# Altium PCB DIOT_Sampler 20spacin.PCBDOC (part 5 of 8)
Units mm, origin at the board's own origin, x right, y up, seen from the top; angles counter-clockwise.
Board outline 222.37 x 100 mm, 4 copper layers (Top, GP1(GND), L3, Bot), stack 1.648 mm thick; 680 components, 424 nets, 2212 pads, 808 vias.
Unrouted connection lines stored in the file: 327.
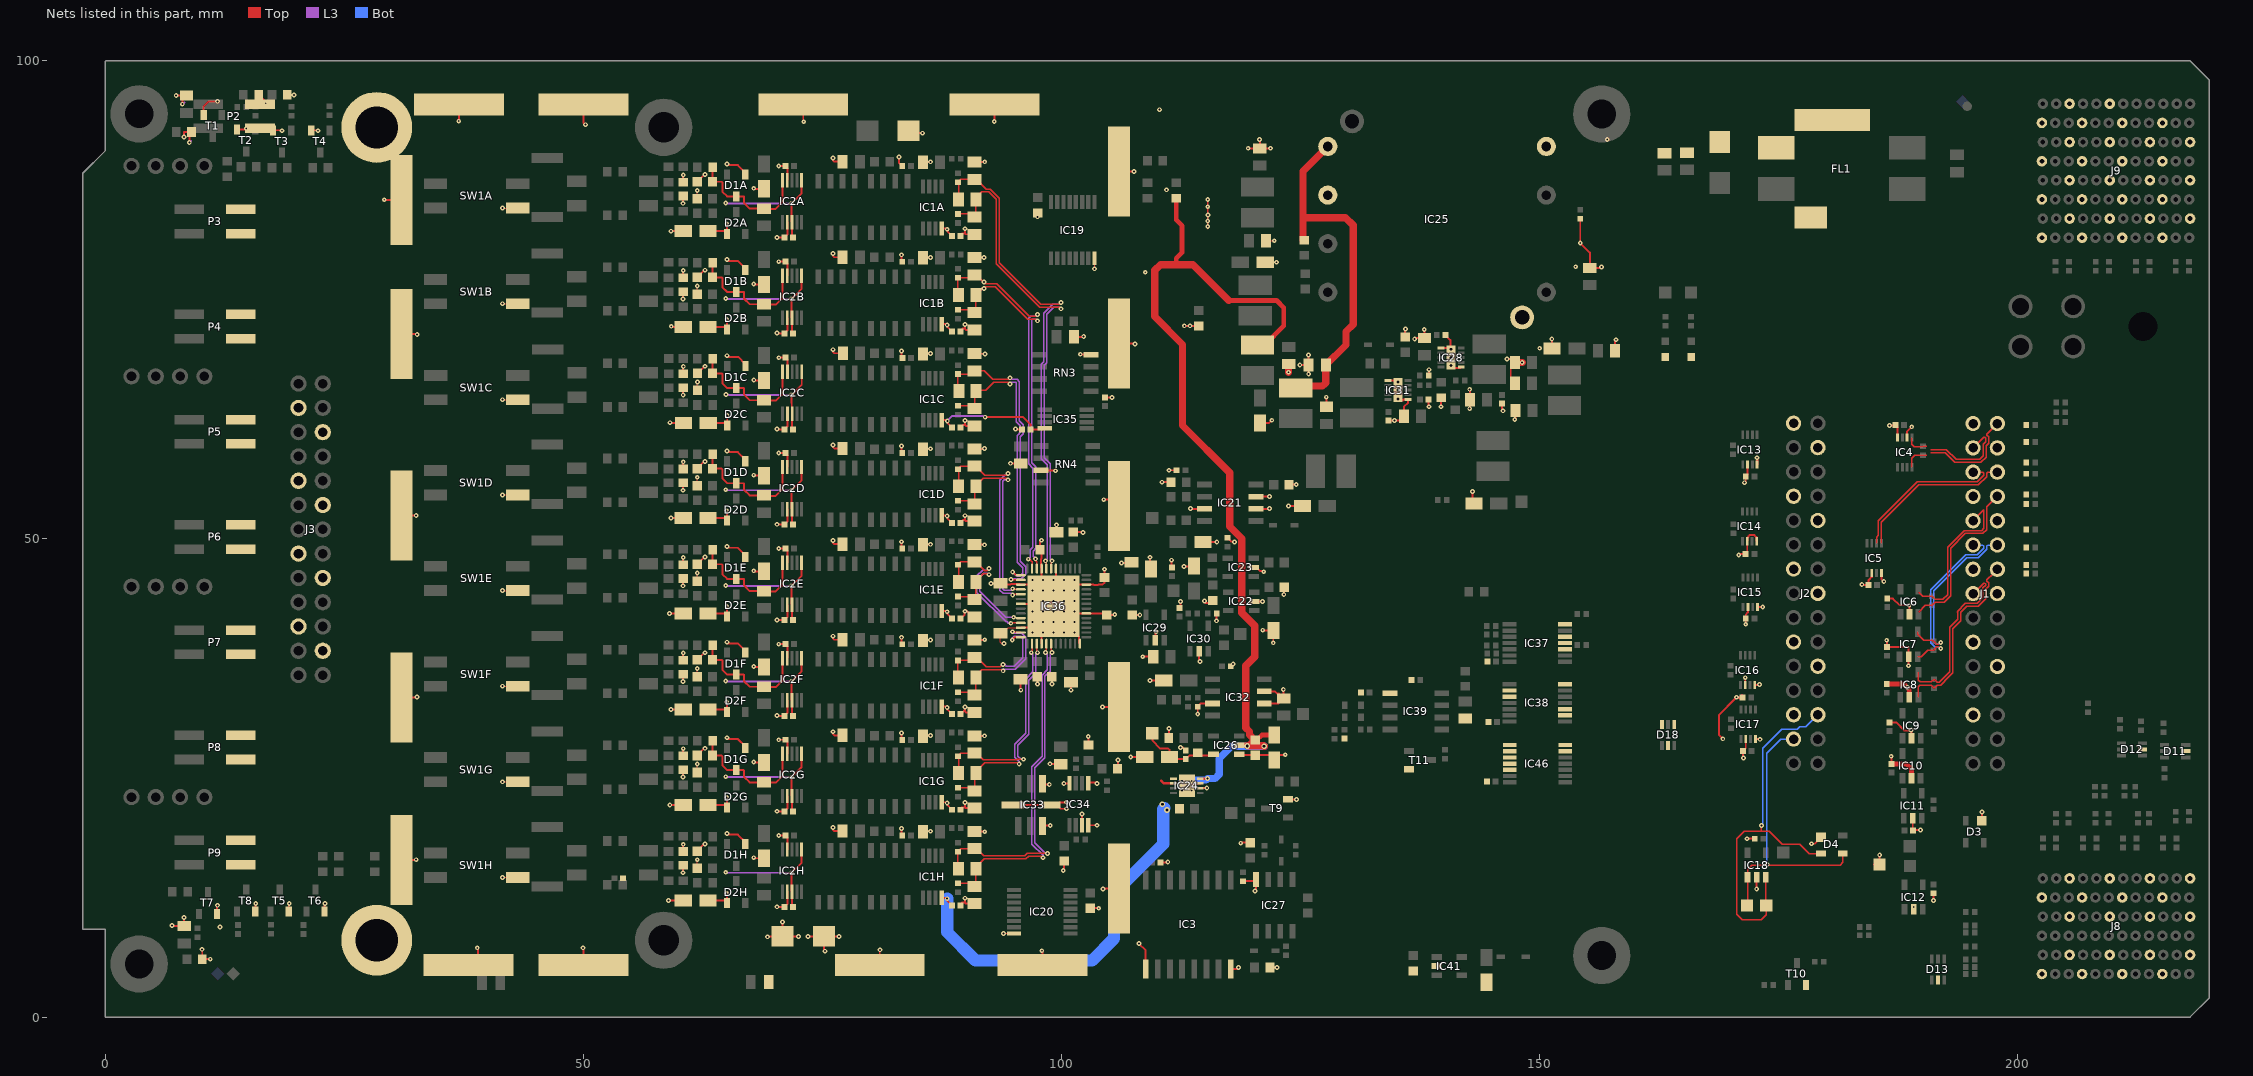
[diagram p6: the nets of this part, all layers, seen from the top]

## Via types
v1: diameter 0.5, hole 0.2, Top to Bot, tented both sides, 765 vias
v2: diameter 0.6, hole 0.3, Top to Bot, tented both sides, 17 vias
v3: diameter 0.5, hole 0.2, Top to Bot, 11 vias
v4: diameter 1, hole 0.6, Top to Bot, tented both sides, 7 vias
v5: diameter 0.6, hole 0.3, Top to Bot, 6 vias
v6: diameter 1.27, hole 0.711, Top to Bot, 2 vias

## Nets (pads, with @x,y where several pads share a name; then routed paths per layer and width w, separated by ;. In a path a pad name is that pad's centre, name@x,y a point inside that pad or via, vN(x,y) a via of type N, cw(c..) or ccw(c..) an arc to the next point about the centre after c; other vN are vias at no path point) (continued)
GND: C1A.1 C1B.1 C1C.1 C1D.1 C1E.1 C1F.1 C1G.1 C1H.1 C3A.1 C3B.1 C3C.1 C3D.1 C3E.1 C3F.1 C3G.1 C3H.1 C4A.1 C4B.1 C4C.1 C4D.1 C4E.1 C4F.1 C4G.1 C4H.1 C5A.1 C5B.1 C5C.1 C5D.1 C5E.1 C5F.1 C5G.1 C5H.1 C7A.2 C7B.2 C7C.2 C7D.2 C7E.2 C7F.2 C7G.2 C7H.2 C8A.2 C8B.2 C8C.2 C8D.2 C8E.2 C8F.2 C8G.2 C8H.2 C9A.1 C9B.1 C9C.1 C9D.1 C9E.1 C9F.1 C9G.1 C9H.1 C10A.1 C10B.1 C10C.1 C10D.1 C10E.1 C10F.1 C10G.1 C10H.1 C11A.1 C11B.1 C11C.1 C11D.1 C11E.1 C11F.1 C11G.1 C11H.1 C12A.1 C12B.1 C12C.1 C12D.1 C12E.1 C12F.1 C12G.1 C12H.1 C13A.1 C13B.1 C13C.1 C13D.1 C13E.1 C13F.1 C13G.1 C13H.1 C14A.1 C14B.1 C14C.1 C14D.1 C14E.1 C14F.1 C14G.1 C14H.1 C15.1 C16.1 C17.1 C18.1 C19.1 C20.1 C21.1 C22.1 C23.1 C24.1 C25.1 C26.1 C27.1 C28.1 C29.1 C30.1 C31.1 C32.1 C33.1 C34.2 C36.2 C37.1 C38.2 C39.1 C41.1 C43.1 C44.2 C45.1 C47.2 C48.1 C49.1 C50.2 C51.1 C52.2 C53.1 C54.1 C55.1 C56.1 C57.1 C58.1 C59.1 C60.1 C61.1 C62.1 C63.1 C64.1 C65.1 C66.1 C67.2 C68.1 C69.1 C70.1 C71.1 C72.1 C73.1 C74.1 C76.1 C77.2 C78.1 C79.1 C80.2 C81.1 C83.1 C84.2 C85.1 C86.1 C87.1 C88.1 C89.1 C90.1 C91.1 C92.1 C93.1 C94.1 C95.1 C96.1 C97.1 C98.1 C99.1 C100.1 C101.1 C102.1 C103.1 C104.1 C105.1 C106.1 C107.1 C108.1 C109.1 C110.1 C111.1 C112.1 C113.1 C114.1 C115.1 C117.1 C118.2 C119.1 C120.1 C121.1 C122.1 C123.1 CLIP1.1 CLIP2.1 CLIP3.1 CLIP4.1 CLIP5.1 CLIP6.1 CLIP7.1 CLIP8.1 CLIP9.1 CLIP10.1 CLIP11.1 CLIP12.1 CLIP13.1 CLIP14.1 CLIP15.1 CLIP16.1 CLIP17.1 CLIP18.1 D3.1 D4.1 D5.2 D6.1 D11.2 D12.2 D13.2 D16.2 D18.2 FL1.4 IC2A.2 IC2A.9 IC2B.2 IC2B.9 IC2C.2 IC2C.9 IC2D.2 IC2D.9 IC2E.2 IC2E.9 IC2F.2 IC2F.9 IC2G.2 IC2G.9 IC2H.2 IC2H.9 IC3.1 IC3.8 IC4.2 IC4.4 IC5.2 IC5.4 IC6.2 IC7.2 IC8.2 IC9.2 IC10.2 IC11.2 IC12.2 IC13.2 IC13.4 IC14.2 IC14.4 IC15.2 IC15.4 IC16.2 IC16.4 IC17.2 IC17.4 IC18.2 IC19.8 IC20.8 IC21.3 IC21.6 IC21.7 IC22.2 IC23.2 IC24.6 IC25.3 IC25.5 IC25.8 IC26.1 IC27.4 IC28.1 IC28.6 IC28.11 IC29.2 IC30.2 IC31.1 IC31.6 IC31.11 IC32.3 IC32.6 IC32.7 IC33.3 IC33.4 IC33.5 IC33.8 IC34.3 IC34.4 IC34.5 IC34.8 IC36.3 IC36.7 IC36.12 IC36.18 IC36.26 IC36.32 IC36.38 IC36.46 IC36.49 IC36.53 IC37.3 IC37.4 IC37.5 IC37.7 IC38.7 IC39.1 IC40.4 IC40.5 IC40.6 IC41.2 IC42.4 IC43.1 IC43.2 IC43.3 IC43.4 IC44.1 IC44.2 IC44.3 IC44.4 IC45.4 IC46.6 IC46.7 IC46.8 IC46.9 IC46.10 IC46.11 IC46.12 J1.1 J1.4 J1.7 J1.10 J1.13 J1.16 J1.19 J1.22 J1.25 J2.1 J2.4 J2.7 J2.10 J2.13 J2.16 J2.19 J2.22 J2.25 J3.3 J3.6 J3.9 J3.12 J3.15 J3.18 J3.21 J3.24 J8.A2 J8.A4 J8.A6 J8.C1 J8.C5 J8.D2 J8.D4 J8.D6 J8.F1 J8.F5 J8.G2 J8.G4 J8.G6 J8.I1 J8.I5 J8.J2 J8.J4 J8.J6 J8.L1 J8.L5 J9.A2 J9.A4 J9.A6 J9.C1 J9.C3 J9.C5 J9.C7 J9.D2 J9.D4 J9.D6 J9.F1 J9.F3 J9.F5 J9.F7 J9.G2 J9.G4 J9.G6 J9.G8 J9.I1 J9.I3 J9.I5 J9.I7 J9.J2 J9.J4 J9.J6 J9.J8 J9.L1 J9.L3 J9.L5 J9.L7 LD7.1 LD8.1 MP1.1 MP2.1 P2.2 P2.4 P3.2 P3.4 P4.2 P4.4 P5.2 P5.4 P6.2 P6.4 P7.2 P7.4 P8.2 P8.4 P9.2 P9.4 R4A.1 R4B.1 R4C.1 R4D.1 R4E.1 R4F.1 R4G.1 R4H.1 R11A.1 R11B.1 R11C.1 R11D.1 R11E.1 R11F.1 R11G.1 R11H.1 R35.2 R38.2 R46.1 R47.1 R49.2 R52.1 R55.1 R57.1 R62.1 R63.1 R68.1 R71.1 R74.1 R75.1 R117.1 RN3.4 RN4.7 SW1A.3 SW1B.3 SW1C.3 SW1D.3 SW1E.3 SW1F.3 SW1G.3 SW1H.3 T1.2 T2.2 T3.2 T4.2 T5.2 T6.2 T7.2 T8.2 T9.2 T10.2 T11.2 TP6.1 | length 450.3
  Top w0.127: v1(41.559,14.6) SW1H.3@43.156,14.6 ; v1(41.559,24.6) SW1G.3@43.156,24.6 ; v1(41.559,34.6) SW1F.3@43.156,34.6 ; v1(41.559,44.6) SW1E.3@43.156,44.6 ; v1(41.559,54.6) SW1D.3@43.156,54.6 ; v1(41.559,74.6) SW1B.3@43.156,74.6 ; v1(41.559,84.6) SW1A.3@43.156,84.6 ; v1(41.572,64.556) SW1C.3@43.169,64.556 ; C5H.1@61.932,15.57 v1(61.932,16.447) ; C5G.1@61.932,25.57 v1(61.932,26.447) ; C5F.1@61.932,35.57 v1(61.932,36.447) ; C5E.1@61.932,45.57 v1(61.932,46.447) ; C5D.1@61.932,55.57 v1(61.932,56.447) ; C5B.1@61.932,75.57 v1(61.932,76.447) ; C5A.1@61.932,85.57 v1(61.932,86.447) ; C5C.1@61.945,65.526 v1(61.945,66.403) ; v1(93.967,8.737) IC20.8@95.069,8.737 ; v1(94.014,39.055) 93.789,39.055 93.639,39.205 C96.1@93.639,40.116 93.85,40.116 94.466,40.732 95.071,40.732 95.092,40.711 95.755,40.711 IC36.12@95.759,40.715 ; v1(103.474,78.245) IC19.8@103.474,79.347 ; C50.2@121.314,78.93 v1(122.514,78.93) ; C49.1@121.414,81.18 v1(122.264,81.18)
  Top w0.203: v3(6.989,9.56) 7.044,9.505 C36.2@8.264,9.505 v3(8.264,10.405) ; v3(7.439,96.38) 7.464,96.355 C34.2@8.523,96.355 8.079,95.911 v3(8.079,95.457) ; v3(8.266,92.038) 8.266,92.532 8.286,92.552 R46.1@9.039,92.552 8.814,92.328 v3(8.814,91.459) ; v1(10.149,7.08) 10.166,7.063 R47.1@10.166,6.055 v1(11.005,6.055) ; T1.2@10.314,94.33 10.314,95.23 10.844,95.76 v1(11.765,95.76) ; T7.2@11.714,10.78 11.714,11.63 v1(11.764,11.68) ; T2.2@13.814,92.83 14.664,92.83 v1(14.764,92.93) ; T8.2@15.714,11.03 15.714,11.83 v1(15.764,11.88) ; R38.2@16.064,96.43 16.807,95.687 v1(16.807,95.56) ; T3.2@17.564,92.73 18.464,92.73 v1(18.514,92.68) ; R35.2@19.064,96.43 v1(19.764,96.43) ; T5.2@19.214,11.03 19.214,11.83 v1(19.264,11.88) ; T4.2@21.564,92.73 22.214,92.73 v1(22.264,92.68) ; T6.2@22.964,11.03 22.964,11.83 v1(23.014,11.88) ; v1(29.199,85.469) 29.238,85.43 CLIP1.1@31.014,85.43 ; CLIP2.1@31.014,16.43 32.514,16.43 v1(32.539,16.455) ; CLIP5.1@31.014,33.43 32.589,33.43 32.614,33.455 v1(32.614,33.48) ; CLIP6.1@31.014,52.43 32.539,52.43 32.564,52.455 v1(32.539,52.455) ; CLIP7.1@31.014,71.43 32.589,71.43 v1(32.639,71.38) ; v1(36.989,93.68) 36.989,93.719 36.914,93.794 37.014,93.894 CLIP18.1@37.014,95.43 ; v1(38.927,7.237) 39.014,7.15 CLIP13.1@39.014,5.43 ; v1(49.976,7.237) 50.014,7.199 CLIP17.1@50.014,5.43 ; CLIP8.1@50.014,95.43 50.014,93.534 v1(50.23,93.318) ; v1(58.914,12.18) C11H.1@60.464,12.18 ; v1(59.039,42.205) 59.064,42.18 C11E.1@60.464,42.18 ; v1(59.064,22.18) C11G.1@60.464,22.18 ; v1(59.089,62.155) 59.108,62.136 C11C.1@60.477,62.136 ; v1(59.189,32.155) 59.214,32.18 C11F.1@60.464,32.18 ; v1(59.189,52.18) C11D.1@60.464,52.18 ; v1(59.189,82.18) C11A.1@60.464,82.18 ; v1(59.214,72.23) 59.264,72.18 C11B.1@60.464,72.18 ; v1(60.446,15.09) R11H.1@60.446,15.862 ; R4H.1@60.446,17.31 v1@60.446,18.07 ; v1(60.446,25.09) R11G.1@60.446,25.862 ; R4G.1@60.446,27.31 v1@60.446,28.07 ; v1(60.446,35.09) R11F.1@60.446,35.862 ; R4F.1@60.446,37.31 v1@60.446,38.07 ; v1(60.446,45.09) R11E.1@60.446,45.862 ; R4E.1@60.446,47.31 v1@60.446,48.07 ; v1(60.446,55.09) R11D.1@60.446,55.862 ; R4D.1@60.446,57.31 v1@60.446,58.07 ; v1(60.446,75.09) R11B.1@60.446,75.862 ; R4B.1@60.446,77.31 v1@60.446,78.07 ; v1(60.446,85.09) R11A.1@60.446,85.862 ; R4A.1@60.446,87.31 v1@60.446,88.07 ; v1(60.459,65.046) R11C.1@60.459,65.818 ; R4C.1@60.459,67.266 v1@60.459,68.026 ; C1H.1@61.932,17.348 v1@62.682,18.098 ; C1G.1@61.932,27.348 v1@62.682,28.098 ; C1F.1@61.932,37.348 v1@62.682,38.098 ; C1E.1@61.932,47.348 v1@62.682,48.098 ; C1D.1@61.932,57.348 v1@62.682,58.098 ; C1B.1@61.932,77.348 v1@62.682,78.098 ; C1A.1@61.932,87.348 v1@62.682,88.098 ; C1C.1@61.945,67.304 v1@62.695,68.054 ; v1(67.832,16.663) 67.887,16.608 C8H.2@68.899,16.608 ; v1(67.832,26.663) 67.887,26.608 C8G.2@68.899,26.608 ; v1(67.832,36.663) 67.887,36.608 C8F.2@68.899,36.608 ; v1(67.832,46.663) 67.887,46.608 C8E.2@68.899,46.608 ; v1(67.832,56.663) 67.887,56.608 C8D.2@68.899,56.608 ; v1(67.832,76.663) 67.887,76.608 C8B.2@68.899,76.608 ; v1(67.832,86.663) 67.887,86.608 C8A.2@68.899,86.608 ; v1(67.845,66.619) 67.9,66.564 C8C.2@68.911,66.564 ; v1(70.269,11.524) 70.294,11.498 C10H.1@71.035,11.498 71.345,11.808 IC2H.2@71.345,13.117 ; v1(70.269,21.524) 70.294,21.498 C10G.1@71.035,21.498 71.345,21.808 IC2G.2@71.345,23.117 ; v1(70.269,31.524) 70.294,31.498 C10F.1@71.035,31.498 71.345,31.808 IC2F.2@71.345,33.117 ; v1(70.269,41.524) 70.294,41.498 C10E.1@71.035,41.498 71.345,41.808 IC2E.2@71.345,43.117 ; v1(70.269,51.524) 70.294,51.498 C10D.1@71.035,51.498 71.345,51.808 IC2D.2@71.345,53.117 ; v1(70.269,71.524) 70.294,71.498 C10B.1@71.035,71.498 71.345,71.808 IC2B.2@71.345,73.117 ; v1(70.269,81.524) 70.294,81.498 C10A.1@71.035,81.498 71.345,81.808 IC2A.2@71.345,83.117 ; v1(70.281,61.48) 70.307,61.454 C10C.1@71.048,61.454 71.358,61.765 IC2C.2@71.358,63.073 ; v1(70.447,18.991) 70.454,18.998 C9H.1@71.135,18.998 71.345,18.788 IC2H.9@71.345,17.517 ; v1(70.447,28.991) 70.454,28.998 C9G.1@71.135,28.998 71.345,28.788 IC2G.9@71.345,27.517 ; v1(70.447,38.991) 70.454,38.998 C9F.1@71.135,38.998 71.345,38.788 IC2F.9@71.345,37.517 ; v1(70.447,48.991) 70.454,48.998 C9E.1@71.135,48.998 71.345,48.788 IC2E.9@71.345,47.517 ; v1(70.447,58.991) 70.454,58.998 C9D.1@71.135,58.998 71.345,58.788 IC2D.9@71.345,57.517 ; v1(70.447,78.991) 70.454,78.998 C9B.1@71.135,78.998 71.345,78.788 IC2B.9@71.345,77.517 ; v1(70.447,88.991) 70.454,88.998 C9A.1@71.135,88.998 71.345,88.788 IC2A.9@71.345,87.517 ; v1(70.459,68.947) 70.466,68.954 C9C.1@71.148,68.954 71.358,68.744 IC2C.9@71.358,67.473 ; CLIP9.1@73.014,95.43 73.014,93.673 v1(73.064,93.623) ; v1(73.514,8.43) D6.1@75.164,8.43 ; v1(75.284,6.886) 75.164,7.006 D6.1@75.164,8.43 ; v1(76.114,19.83) 76.114,19.605 76.264,19.455 C3H.1@77.139,19.455 ; v1(76.114,29.83) 76.114,29.605 76.264,29.455 C3G.1@77.139,29.455 ; v1(76.114,39.83) 76.114,39.605 76.264,39.455 C3F.1@77.139,39.455 ; v1(76.114,49.83) 76.114,49.605 76.264,49.455 C3E.1@77.139,49.455 ; v1(76.114,59.83) 76.114,59.605 76.264,59.455 C3D.1@77.139,59.455 ; v1(76.114,79.83) 76.114,79.605 76.264,79.455 C3B.1@77.139,79.455 ; v1(76.114,89.83) 76.114,89.605 76.264,89.455 C3A.1@77.139,89.455 ; v1(76.127,69.786) 76.127,69.561 76.277,69.411 C3C.1@77.152,69.411 ; v1(76.739,8.43) D6.1@75.164,8.43 ; CLIP16.1@81.014,5.43 81.014,7.005 v1(81.039,7.03) ; v1(83.014,89.93) 83.014,89.33 C13A.1@83.364,88.98 ; v1(83.289,19.705) 83.289,19.055 C13H.1@83.364,18.98 ; v1(83.289,29.705) 83.289,29.055 C13G.1@83.364,28.98 ; v1(83.289,39.705) 83.289,39.055 C13F.1@83.364,38.98 ; v1(83.289,49.705) 83.289,49.055 C13E.1@83.364,48.98 ; v1(83.289,59.705) 83.289,59.055 C13D.1@83.364,58.98 ; v1(83.289,79.705) 83.289,79.055 C13B.1@83.364,78.98 ; v1(83.302,69.661) 83.302,69.011 C13C.1@83.377,68.936 ; D5.2@83.914,92.43 v1(85.483,92.43) ; C12H.1@85.514,19.38 85.564,19.43 v1(86.314,19.43) ; C12G.1@85.514,29.38 85.564,29.43 v1(86.314,29.43) ; C12F.1@85.514,39.38 85.564,39.43 v1(86.314,39.43) ; C12E.1@85.514,49.38 85.564,49.43 v1(86.314,49.43) ; C12D.1@85.514,59.38 85.564,59.43 v1(86.314,59.43) ; C12B.1@85.514,79.38 85.564,79.43 v1(86.314,79.43) ; C12A.1@85.514,89.38 85.564,89.43 v1(86.314,89.43) ; C12C.1@85.527,69.336 85.577,69.386 v1(86.327,69.386) ; C14H.1@89.464,11.68 89.539,11.755 89.539,11.88 89.615,11.956 89.923,11.956 ; C14G.1@89.464,21.68 89.564,21.78 89.564,21.93 89.897,21.93 89.923,21.956 ; C14F.1@89.464,31.68 89.832,32.048 89.923,31.956 ; C14D.1@89.464,51.68 89.689,51.905 89.689,51.955 89.69,51.956 89.923,51.956 ; C14B.1@89.464,71.68 89.664,71.88 89.664,71.98 89.899,71.98 89.923,71.956 ; C14A.1@89.464,81.68 89.639,81.855 89.639,81.93 89.665,81.956 89.923,81.956 ; C14C.1@89.477,61.636 89.753,61.912 89.936,61.912 ; v1@89.877,42.417 89.877,42.093 C14E.1@89.464,41.68 89.489,41.68 89.893,42.084 89.893,42.4 v1(89.923,42.43) 90.031,42.538 90.713,41.856 C4E.1@90.923,41.856 ; v1(89.923,12.43) 89.923,11.956 ; v1(89.923,22.43) 89.923,21.956 ; v1(89.923,32.43) 89.923,31.956 ; v1(89.923,52.43) 89.923,51.956 ; v1(89.923,72.43) 89.923,71.956 ; v1(89.923,82.43) 89.923,81.956 ; v1(89.936,62.386) 89.936,61.912 ; C4H.1@90.923,11.856 90.023,11.856 89.923,11.956 ; C7H.2@90.923,19.406 91.963,19.406 v1(91.989,19.38) ; C4G.1@90.923,21.856 90.023,21.856 89.923,21.956 ; C7G.2@90.923,29.406 91.963,29.406 v1(91.964,29.405) ; C4F.1@90.923,31.856 90.023,31.856 89.923,31.956 ; C7F.2@90.923,39.406 91.94,39.406 v1(91.989,39.455) ; C7E.2@90.923,49.406 91.938,49.406 v1(91.964,49.38) ; C4D.1@90.923,51.856 90.023,51.856 89.923,51.956 ; C7D.2@90.923,59.406 91.915,59.406 v1(91.964,59.455) ; C4B.1@90.923,71.856 90.023,71.856 89.923,71.956 ; C7B.2@90.923,79.406 91.89,79.406 v1(91.914,79.43) ; C4A.1@90.923,81.856 90.023,81.856 89.923,81.956 ; C7A.2@90.923,89.406 91.965,89.406 v1(91.989,89.43) ; C4C.1@90.936,61.812 90.036,61.812 89.936,61.912 ; C7C.2@90.936,69.362 91.982,69.362 v1(92.014,69.33) ; v1(92.639,45.33) 92.654,45.345 C97.1@93.639,45.345 93.769,45.215 94.661,45.215 94.716,45.27 95.704,45.27 IC36.3@95.759,45.215 96.934,45.215 IC36.53@97.934,44.215 ; v1(92.989,93.655) 93.014,93.68 CLIP10.1@93.014,95.43 ; v1(94.689,57.905) 94.714,57.88 C106.1@95.764,57.88 ; IC33.8@95.014,22.184 IC33.4@98.964,22.184 IC33.4@99.539,22.184 ; v1(95.214,61.505) 95.264,61.455 C105.1@95.889,61.455 ; C91.1@95.725,35.307 95.725,34.219 v1(95.764,34.18) ; IC36.12@95.759,40.715 96.934,40.715 IC36.53@97.934,41.715 ; IC36.7@95.759,43.215 IC36.53@98.934,43.215 ; C32.1@97.429,84.184 C32.1@97.514,84.099 ; v1(97.503,34.835) C89.1@97.503,35.585 ; v1(97.514,83.68) C32.1@97.514,84.099 ; C32.1@97.527,84.086 C32.1@97.514,84.099 ; RN4.7@97.889,57.17 99.349,57.17 v1(99.389,57.13) ; IC36.18@97.934,39.04 IC36.53@97.934,41.715 ; v1(97.939,49.855) 97.789,49.705 C90.1@97.789,48.88 97.934,48.735 97.934,47.958 97.879,47.903 97.879,46.945 IC36.49@97.934,46.89 IC36.53@97.934,44.215 ; v1(97.964,6.93) 98.014,6.88 CLIP14.1@98.014,5.43 ; IC33.3@98.034,19.984 98.085,20.034 v1(98.842,20.034) ; IC33.5@98.034,24.384 98.105,24.313 v1(98.743,24.313) ; v1(98.814,26.48) 98.842,26.452 C99.1@99.944,26.452 ; C87.1@99.002,35.585 99.002,34.847 v1(99.014,34.835) ; IC36.46@99.434,46.89 IC36.53@99.434,43.215 ; C98.1@99.485,50.671 v1(99.485,51.471) ; v1(100.202,15.327) 100.284,15.41 C101.1@100.284,16.316 ; v1(100.264,24.431) 100.816,24.431 IC34.8@100.902,24.517 ; v1(100.541,21.78) 99.943,21.78 IC33.4@99.539,22.184 ; v1(100.541,22.459) 100.514,22.432 99.787,22.432 IC33.4@99.539,22.184 ; v1(101.014,34.18) C95.1@101.014,35.03 ; C88.1@101.264,50.73 102.214,50.73 v1(102.264,50.68) ; C103.1@101.314,71.13 102.289,71.13 102.314,71.155 v1(102.339,71.155) ; IC36.26@101.934,39.04 101.855,39.119 101.855,39.744 v1(101.384,40.215) v1(100.284,41.315) v1(99.184,42.415) IC36.53@99.184,42.965 ; v1(101.989,69.305) 102.034,69.26 RN3.4@103.114,69.26 ; IC34.3@102.164,20.055 v1(102.164,21.23) ; IC34.4@102.814,20.055 102.815,20.056 v1(103.719,20.056) ; IC34.5@102.814,24.455 102.876,24.455 102.937,24.517 103.553,24.517 103.639,24.431 v1(103.719,24.431) ; v1(102.814,29.336) 102.839,29.36 C100.1@102.839,28.43 ; C33.1@103.014,11.38 v1(103.914,11.38) ; v1(104.314,32.43) CLIP3.1@106.014,32.43 ; v1(104.364,13.38) 104.414,13.43 CLIP15.1@106.014,13.43 ; v1(104.439,54.105) 105.339,54.105 CLIP12.1@106.014,53.43 ; v1(104.514,46.83) C92.1@104.514,45.98 104.514,45.43 104.299,45.215 103.887,45.215 103.832,45.161 103.436,45.161 103.381,45.215 IC36.38@102.609,45.215 101.434,45.215 IC36.53@99.434,43.215 ; C104.1@104.589,64.805 105.264,64.805 v1(105.289,64.78) ; v1(105.589,42.08) 105.564,42.055 C93.1@104.764,42.055 104.604,42.215 IC36.32@102.609,42.215 99.934,42.215 IC36.53@99.184,42.965 ; C102.1@105.864,25.959 105.939,26.034 v1(105.939,26.88) ; CLIP4.1@106.014,70.43 107.664,70.43 v1(107.714,70.38) ; CLIP11.1@106.014,88.43 v1(107.589,88.43) ; v1(106.283,47.49) 107.232,47.49 C94.1@107.322,47.58 ; v1@107.264,27.18 C63.1@108.714,27.18 ; C71.1@107.43,42.03 107.455,42.055 v1(108.212,42.055) ; v1(108.114,7.68) 108.819,6.975 IC3.1@108.819,5.03 ; v1(108.514,37.68) C68.1@109.614,37.68 ; v1(109.264,35.18) C84.2@110.714,35.18 ; v1(109.27,48.08) 109.27,46.961 C77.2@109.387,46.844 ; IC29.2@109.814,39.382 109.867,39.435 109.867,40.239 v1(109.92,40.292) ; C15.1@110.389,16.18 111.114,16.18 v1(111.139,16.205) ; v1(110.514,55.93) R52.1@111.464,55.93 ; R63.1@111.214,29.18 111.264,29.23 v1(111.264,30.18) ; v1(111.264,57.18) C39.1@112.064,57.18 ; v1(111.514,47.774) 111.514,47.092 C45.1@111.591,47.015 ; C76.1@112.341,42.772 112.464,42.895 v1(112.464,43.446) ; v1(112.464,28.18) 112.714,28.18 C64.1@113.014,27.88 ; v1(112.814,47.104) 113.841,47.104 C44.2@113.895,47.157 ; v1@112.839,72.305 v1(112.864,72.28) C51.1@114.389,72.28 ; v1(113.514,53.18) 113.55,53.144 IC21.3@114.963,53.144 ; v1(114.264,31.68) R75.1@114.264,32.46 114.599,32.795 IC32.3@115.814,32.795 ; IC30.2@114.415,38.229 114.415,37.279 v1(114.514,37.18) ; IC24.6@114.539,23.934 114.548,23.943 115.203,23.943 v1(115.212,23.952) ; C38.2@114.814,49.68 v1(116.264,49.68) ; v1(114.969,43.515) 114.969,43.435 115.09,43.314 115.09,43.298 115.569,43.298 C41.1@115.837,43.566 ; v1@115.314,82.48 v1(115.314,82.655) v1(115.314,83.23) v1(115.314,84.73) v1(115.314,85.48) v1@115.389,85.555 ; v1(116.234,41.43) R71.1@116.234,42.18 ; R55.1@117.389,50.111 117.409,50.111 117.597,49.923 117.597,49.903 117.777,49.723 118.069,49.723 v1(118.112,49.68) ; IC3.8@117.709,5.03 118.364,5.03 v1(118.514,5.18) ; C83.1@117.714,36.68 117.966,36.932 v1(117.97,36.932) ; IC26.1@118.614,27.48 118.714,27.38 C61.1@120.264,27.38 123.364,27.38 v1(123.414,27.43) ; v1(118.764,18.18) 118.814,18.23 C65.1@119.764,18.23 ; R62.1@119.014,14.21 120.189,14.21 IC27.4@120.359,14.38 120.359,13.275 v1(120.264,13.18) ; v1(119.539,90.855) 119.564,90.83 C48.1@120.764,90.83 ; IC23.2@120.114,47.019 120.389,47.019 120.786,46.622 121.107,46.622 v1(121.164,46.565) ; IC22.2@120.164,43.465 121.046,43.465 v1(121.05,43.461) ; IC21.6@120.363,53.144 121.728,53.144 v1(121.764,53.18) ; IC21.7@120.363,54.414 121.748,54.414 v1(121.764,54.43) ; v1(120.714,91.78) 120.764,91.73 C48.1@120.764,90.83 ; C60.1@120.764,62.13 121.739,62.13 v1(122.014,62.405) ; v1(121.064,40.455) 121.089,40.43 C47.2@122.164,40.43 v1(122.164,39.13) ; IC32.6@121.214,32.795 122.729,32.795 C81.1@123.264,33.33 C81.1@123.139,33.455 ; IC32.7@121.214,34.065 122.329,34.065 122.564,33.83 122.764,33.83 C81.1@123.139,33.455 ; C72.1@121.814,5.18 v1(122.564,5.18) ; v1(121.864,90.855) 121.839,90.83 C48.1@120.764,90.83 ; v1(123.214,34.255) 123.214,33.53 C81.1@123.139,33.455 ; v1(123.264,44.18) 123.314,44.23 C43.1@123.314,44.93 ; T9.2@123.699,22.767 124.577,22.767 v1(124.589,22.755) ; v1(123.764,53.43) C80.2@125.214,53.43 ; C37.1@123.814,55.68 v1(124.564,55.68) ; v1(124.939,68.18) C58.1@125.864,68.18 ; v1(125.839,69.23) 125.864,69.205 C58.1@125.864,68.18 ; v1(125.864,67.23) C58.1@125.864,68.18 ; v1(127.706,64.82) 127.731,64.795 C79.1@127.731,63.82 ; IC31.6@134.161,66.57 134.711,66.57 135.211,66.07 v5(135.211,65.57) 135.211,64.995 135.711,64.495 135.786,64.57 IC31.1@136.261,64.57 136.261,64.245 135.811,63.795 C86.1@135.811,62.82 135.636,62.645 135.636,62.37 v1(134.836,62.37) C78.1@134.211,62.37 ; C66.1@135.961,71.12 135.961,71.92 v1(135.986,71.945) ; v1(136.948,70.89) 137.064,71.005 C74.1@137.979,71.005 137.979,71.859 v1(137.948,71.89) ; C85.1@138.411,64.57 138.411,63.87 v1(138.461,63.82) ; R74.1@138.431,67.07 138.431,67.665 v1(138.461,67.695) ; v1(139.711,63.82) R68.1@139.711,64.77 ; IC28.1@139.712,69.965 140.394,69.965 IC28.11@140.762,69.596 ; C73.1@140.161,71.32 140.695,70.786 140.695,69.9 v5(140.762,69.832) v5(140.762,68.965) ; v5(140.762,68.14) 141.012,67.89 141.738,67.89 IC28.6@141.812,67.965 ; v1(142.698,63.618) 142.718,63.638 C70.1@142.718,64.568 142.718,65.621 v1(142.698,65.64) ; v1(142.998,54.953) 142.998,53.855 C67.2@143.139,53.714 ; C69.1@146.082,64.144 146.082,63.507 v1(146.198,63.39) ; v1(146.616,68.798) 147.076,68.798 C55.1@147.423,68.451 ; C55.1@147,68.397 147,66.716 C56.1@147.423,66.292 ; v1(147.417,62.472) 147.474,62.529 C57.1@147.474,63.422 ; v1(151.293,70.905) 151.318,70.88 C52.2@151.318,69.93 ; R57.1@154.264,83.46 v1(154.264,80.93) 155.264,79.93 C53.1@155.264,78.33 156.6,78.33 v1(156.494,78.436) ; C54.1@157.914,69.68 157.914,70.723 v1(158.014,70.823) ; v1(169.171,29.091) 168.761,29.501 168.761,31.583 170.54,33.362 170.874,33.362 171.095,33.583 171.112,33.583 171.171,33.642 C25.1@171.171,33.668 ; v1(170.616,33.438) 170.621,33.434 C25.1@171.244,33.434 ; v1(170.836,48.331) 170.926,48.421 C30.1@171.564,48.421 171.726,48.583 IC14.2@171.726,49.751 ; v1(171.346,27.091) 171.288,27.149 C27.1@171.288,27.838 171.571,28.121 IC17.2@171.571,29.066 ; v1(171.426,55.883) 171.574,56.031 C28.1@171.574,56.524 171.76,56.71 IC13.2@171.76,57.789 ; IC16.2@171.516,34.738 v1(171.516,35.488) ; v1(171.569,41.074) C26.1@171.569,41.673 171.569,42.074 171.802,42.306 IC15.2@171.802,42.876 ; IC14.2@171.677,49.751 171.774,49.848 171.774,50.136 171.847,50.209 171.847,50.271 171.981,50.405 172.47,50.405 172.677,50.198 172.677,49.799 IC14.4@172.726,49.751 ; v1(171.714,18.648) C31.1@172.514,18.648 ; IC16.4@172.516,35.013 IC16.4@172.516,34.738 172.998,34.738 v1(173.021,34.762) ; IC17.4@172.571,29.066 173.021,29.066 v1(173.046,29.041) ; v1(172.714,13.398) IC18.2@172.714,14.598 ; IC15.4@172.802,42.876 v1(173.352,42.876) ; v1(178.446,18.121) 178.763,18.121 D4.1@179.437,18.795 ; v1(183.712,45.246) 183.778,45.18 C22.1@184.418,45.18 184.418,45.701 184.75,46.034 IC5.2@184.75,46.443 ; TP6.1@184.977,15.948 185.577,15.948 v1(185.577,16.937) ; IC5.4@185.75,46.443 185.75,45.794 v1(186.012,45.532) ; v1(186.306,39.401) 186.333,39.374 C16.1@186.333,38.684 188.519,38.684 188.607,38.596 IC7.2@188.607,37.698 188.607,36.753 v1(188.59,36.737) ; C17.1@186.365,43.762 186.965,43.762 187.665,43.062 v1(188.665,43.062) 188.693,43.034 IC6.2@188.693,42.122 ; v1(186.606,61.844) 187.178,61.844 C23.1@187.236,61.901 187.45,61.687 IC4.4@187.45,60.598 ; C20.1@186.615,30.812 187.295,30.812 188.144,29.964 188.912,29.964 IC9.2@188.912,29.146 IC9.2@188.817,29.051 ; v1(186.781,27.275) 186.805,27.252 C19.1@186.805,26.455 ; IC4.2@188.45,60.598 188.45,61.238 v1(188.931,61.719) ; IC11.2@189.035,20.786 189.035,19.519 C18.1@189.067,19.487 189.127,19.546 v1(189.854,19.546) ; IC12.2@189.142,11.296 v1(189.142,11.521) ; v1(191.21,12.198) C24.1@191.21,12.948 ; v3(196.266,21.452) 196.271,21.447 D3.1@196.271,20.525 ; IC36.53@97.934,41.715 IC36.53@99.184,42.965 ; IC36.53@97.934,44.215 IC36.53@98.934,43.215 ; IC36.53@98.934,43.215 IC36.53@99.184,42.965 ; IC36.53@99.184,42.965 IC36.53@99.434,43.215
  Top w0.254: IC13.4@172.76,57.789 v1(172.76,58.487)
  Top w0.508: C21.1@186.315,34.812 188.115,34.812 v1(188.478,34.45) 188.675,34.252 IC8.2@188.675,33.458 ; C19.1@186.805,26.455 188.398,26.455 188.9,25.952 IC10.2@188.9,24.959
  Top w0.762: v1(123.764,67.43) C59.1@123.764,68.28 ; C55.1@147.423,68.451 v1(148.19,68.451)
  L3 w0.203: v3(8.079,95.457) 8.117,95.457 8.314,95.655 ; v3(8.814,91.459) v3@8.985,91.63
  other v1: 12.014,9.43 60.461,18.062 62.732,18.098 107.264,27.18 60.461,28.062 62.732,28.098 188.854,30.021 60.461,38.062 62.732,38.098 96.984,40.215 98.084,40.215 99.184,40.215 100.284,40.215 96.984,41.315 98.084,41.315 99.184,41.315 101.384,41.315 96.984,42.415 98.084,42.415 100.284,42.415 101.384,42.415 96.984,43.515 98.084,43.515 99.184,43.515 100.284,43.515 101.384,43.515 96.984,44.615 98.084,44.615 99.184,44.615 100.284,44.615 101.384,44.615 96.984,45.715 98.084,45.715 99.184,45.715 100.284,45.715 101.384,45.715 60.461,48.062 62.732,48.098 60.461,58.062 62.732,58.098 60.473,68.018 62.745,68.054 150.022,69.939 113.464,72.28 108.777,77.886 60.461,78.062 62.732,78.098 153.786,78.462 115.339,83.88 110.989,86.505 60.461,88.062 62.732,88.098 157.088,91.771 110.277,94.886
  other v5: 135.211,64.645 135.211,66.42
I2C1_SCL: D4.3 IC18.1 TP4.1 | length 30
  Top w0.152: TP4.1@171.714,11.648 171.764,11.698 IC18.1@171.764,14.598 171.764,15.448 172.214,15.898 181.473,15.898 181.737,16.162 D4.3@181.737,17.095
  Bot w0.152: v1@173.751,16.039 173.751,27.601 175.216,29.066 176.572,29.066
  other v1: 173.828,15.962
I2C1_SDA: D4.2 IC18.3 TP3.1 | length 41.4
  Top w0.152: v1(173.227,20.043) 173.214,20.03 173.214,19.448 ; IC18.3@173.664,14.598 173.664,11.698 TP3.1@173.714,11.648 173.714,10.698 173.214,10.198 171.214,10.198 170.642,10.77 170.642,18.651 171.439,19.448 173.214,19.448 ; D4.2@179.437,17.095 178.22,17.095 177.223,18.092 175.37,18.092 174.014,19.448 173.214,19.448
  Bot w0.152: v1(173.227,20.043) v1@173.294,19.977 ; v1@173.352,20.043 173.352,28.089 175.332,30.069 176.952,30.069 177.228,30.345 177.851,30.345 179.112,31.606
I2C_SCL: IC38.9 IC38.10
I2C_SCL1: D18.6 IC44.6 IC45.6 J2.27
I2C_SDA: IC38.2 IC38.3
I2C_SDA1: D18.4 IC44.5 IC45.5 J2.26
IN_0_N: C4A.2 C6A.2 IC36.47 R6A.2 | length 51.1
  Top w0.152: R6A.2@89.173,83.976 90.603,83.976 C4A.2@90.923,83.656 91.073,83.806 C6A.2@91.073,85.506 91.073,85.689 91.664,86.28 92.428,86.28 93.214,85.494 93.214,78.755 97.739,74.23 99.79,74.23 v1(99.964,74.056) ; IC36.47@98.934,46.89 98.934,47.629 v1(99.01,47.705)
  L3 w0.152: v1(99.01,47.705) 98.836,47.879 98.836,57.864 98.205,58.496 98.205,68.146 98.469,68.41 98.469,73.48 99.219,74.23 99.79,74.23 v1(99.964,74.056)
IN_0_P: C6A.1 C7A.1 IC36.48 R12A.2 | length 51.6
  Top w0.152: C6A.1@89.273,85.506 89.273,87.186 R12A.2@89.173,87.286 89.493,87.606 C7A.1@90.923,87.606 91.138,87.606 92.159,86.585 92.554,86.585 93.519,85.62 93.519,78.881 97.865,74.535 99.79,74.535 v1(99.964,74.709) ; v1(98.358,47.705) 98.434,47.629 IC36.48@98.434,46.89
  L3 w0.152: v1(98.358,47.705) 98.532,47.879 98.532,57.737 97.989,58.28 97.9,58.369 97.9,68.272 97.989,68.361 98.164,68.536 98.164,73.606 99.093,74.535 99.79,74.535 v1(99.964,74.709)
IN_1_N: C4B.2 C6B.2 IC36.50 R6B.2 | length 39.4
  Top w0.152: R6B.2@89.173,73.976 90.603,73.976 C4B.2@90.923,73.656 91.073,73.806 C6B.2@91.073,75.506 91.639,76.072 91.639,76.23 91.898,76.23 91.918,76.21 v1(91.918,76.184) 92.102,76.367 93.114,76.367 96.501,72.98 97.34,72.98 v1(97.514,72.806) ; v1(97.289,47.915) 97.289,47.774 97.434,47.629 IC36.50@97.434,46.89
  L3 w0.152: v1(97.289,47.915) 97.289,47.98 97.064,48.205 97.064,48.733 97.336,49.005 97.336,57.539 96.903,57.972 96.903,72.944 96.939,72.98 97.34,72.98 v1(97.514,72.806)
IN_1_P: C6B.1 C7B.1 IC36.51 R12B.2 | length 40
  Top w0.152: C6B.1@89.273,75.506 89.173,75.606 R12B.2@89.173,77.286 90.445,77.286 90.765,77.606 C7B.1@90.923,77.606 91.113,77.606 91.814,76.905 91.873,76.905 v1(91.923,76.855) 92.106,76.672 93.24,76.672 96.627,73.285 97.34,73.285 v1(97.514,73.459) ; v1(96.539,47.88) 96.683,47.88 96.81,47.752 96.81,47.717 96.934,47.594 IC36.51@96.934,46.89
  L3 w0.152: v1(96.539,47.88) 96.759,48.1 96.759,48.859 97.032,49.131 97.032,57.412 96.598,57.846 96.598,73.071 96.813,73.285 97.34,73.285 v1(97.514,73.459)
IN_2_N: C4C.2 C6C.2 IC36.1 R6C.2 | length 31.6
  Top w0.152: R6C.2@89.186,63.932 90.616,63.932 C4C.2@90.936,63.612 90.936,65.312 C6C.2@91.086,65.462 91.086,65.752 91.282,65.555 92.1,65.555 92.911,66.365 94.465,66.365 v1(94.639,66.191) ; v1(94.914,46.53) 95.214,46.23 95.214,46.215 IC36.1@95.759,46.215
  L3 w0.152: v1(94.639,66.191) 94.813,66.365 95.239,66.365 95.289,66.315 95.289,62.249 95.714,61.824 95.714,61.13 95.489,60.905 95.4,60.816 95.4,47.546 95.966,46.98 95.966,46.422 95.661,46.118 95.326,46.118 v1(94.914,46.53)
IN_2_P: C6C.1 C7C.1 IC36.2 R12C.2 | length 32.4
  Top w0.152: C6C.1@89.286,65.462 89.186,65.562 R12C.2@89.186,67.242 90.616,67.242 C7C.1@90.936,67.562 91.962,67.562 92.855,66.67 94.465,66.67 v1(94.639,66.844) ; v1(94.744,45.757) 94.898,45.757 94.94,45.715 IC36.2@95.759,45.715
  L3 w0.152: v1(94.639,66.844) 94.813,66.67 95.365,66.67 95.594,66.441 95.594,62.375 96.019,61.95 96.019,61.004 95.705,60.689 95.705,47.672 96.272,47.105 96.272,46.297 95.788,45.813 94.799,45.813 v1(94.744,45.757)
IN_3_N: C4D.2 C6D.2 IC36.4 R6D.2 | length 21.5
  Top w0.152: R6D.2@89.173,53.976 90.603,53.976 C4D.2@90.923,53.656 90.923,55.356 C6D.2@91.073,55.506 91.073,55.589 91.834,56.35 94.24,56.35 v1(94.414,56.176) ; v1(94.914,44.792) 94.99,44.715 IC36.4@95.759,44.715
  L3 w0.152: v1(94.414,56.176) 94.04,56.176 93.889,56.025 93.889,44.768 94.039,44.618 94.74,44.618 v1(94.914,44.792)
IN_3_P: C6D.1 C7D.1 IC36.5 R12D.2 | length 22.7
  Top w0.152: C6D.1@89.273,55.506 89.273,57.186 R12D.2@89.173,57.286 89.493,57.606 C7D.1@90.923,57.606 91.063,57.606 92.014,56.655 94.24,56.655 v1(94.414,56.829) ; v1(94.914,44.139) 94.99,44.215 IC36.5@95.759,44.215
  L3 w0.152: v1(94.414,56.829) 94.24,56.655 94.088,56.655 93.584,56.151 93.584,44.642 93.913,44.313 94.74,44.313 v1(94.914,44.139)
IN_4_N: C4E.2 C6E.2 IC36.10 R6E.2 | length 13
  Top w0.152: R6E.2@89.173,43.976 90.603,43.976 C4E.2@90.923,43.656 91.073,43.806 C6E.2@91.073,45.506 91.073,45.614 91.814,46.355 ; 91.788,46.355 91.814,46.355 ; v1(92.439,46.256) 92.34,46.355 91.814,46.355
  L3 w0.152: v1(92.439,46.256) 92.265,46.43 91.889,46.43 91.461,46.002 91.461,44.521 94.175,41.807 v1(95.019,41.807)
IN_4_P: C6E.1 C7E.1 IC36.11 R12E.2 | length 15
  Top w0.152: C6E.1@89.273,45.506 89.273,47.186 R12E.2@89.173,47.286 89.493,47.606 C7E.1@90.923,47.606 91.038,47.606 91.939,46.705 91.939,46.68 92.186,46.68 92.415,46.909 v1(92.439,46.909) ; v1(94.719,41.182) 94.752,41.215 IC36.11@95.759,41.215
  L3 w0.152: v1(92.439,46.909) 92.265,46.735 91.763,46.735 91.156,46.128 91.156,44.395 94.238,41.313 94.339,41.313 94.47,41.182 v1(94.719,41.182)
IN_5_N: C4F.2 C6F.2 IC36.13 R6F.2 | length 14.9
  Top w0.152: R6F.2@89.173,33.976 90.603,33.976 C4F.2@90.923,33.656 91.073,33.806 C6F.2@91.073,35.506 91.073,35.714 91.659,36.3 93.765,36.3 93.795,36.33 v1(93.919,36.207) ; v1(94.889,40.292) 94.965,40.215 IC36.13@95.759,40.215
  L3 w0.152: v1@93.795,36.33 93.84,36.375 95.19,36.375 96.269,37.454 96.269,39.734 95.885,40.118 95.063,40.118 v1(94.889,40.292)
IN_5_P: C6F.1 C7F.1 IC36.14 R12F.2 | length 14.2
  Top w0.152: C6F.1@89.273,35.506 89.173,35.606 R12F.2@89.173,37.286 90.603,37.286 C7F.1@90.923,37.606 91.138,37.606 92.139,36.605 93.639,36.605 v1(93.914,36.88) ; v1(94.864,39.43) 95.149,39.715 IC36.14@95.759,39.715
  L3 w0.152: v1(93.914,36.88) 94.064,36.88 94.264,36.68 95.064,36.68 95.964,37.58 95.964,39.608 95.759,39.813 95.063,39.813 94.864,39.614 v1(94.864,39.43)
IN_6_N: C4G.2 C6G.2 IC36.16 R6G.2 | length 22.6
  Top w0.152: R6G.2@89.173,23.976 90.603,23.976 C4G.2@90.923,23.656 90.923,25.356 C6G.2@91.073,25.506 91.073,25.664 91.984,26.575 93.689,26.575 93.702,26.588 95.462,26.588 v1(95.594,26.456) ; v1(96.858,38.105) 96.934,38.181 IC36.16@96.934,39.04
  L3 w0.152: v1(95.594,26.456) 95.594,26.716 95.234,27.075 95.145,27.165 95.145,28.536 95.234,28.625 96.284,29.675 96.284,35.336 97.032,36.083 97.032,37.931 v1(96.858,38.105)
IN_6_P: C6G.1 C7G.1 IC36.17 R12G.2 | length 22.5
  Top w0.152: C6G.1@89.273,25.506 89.273,27.186 R12G.2@89.173,27.286 89.493,27.606 C7G.1@90.923,27.606 91.138,27.606 91.839,26.905 93.689,26.905 93.702,26.893 95.339,26.893 95.381,26.935 96.022,26.935 v1(96.044,26.956) ; IC36.17@97.434,39.04 97.434,38.181 v1(97.51,38.105)
  L3 w0.152: v1(96.044,26.956) 95.784,26.956 95.45,27.291 95.45,28.41 96.589,29.549 96.589,35.21 97.336,35.957 97.336,37.931 v1(97.51,38.105)
IN_7_N: C4H.2 C6H.2 IC36.19 R6H.2 | length 35.2
  Top w0.152: R6H.2@89.173,13.976 90.603,13.976 C4H.2@90.923,13.656 91.073,13.806 C6H.2@91.073,15.506 91.073,15.714 91.921,16.562 96.302,16.562 96.569,16.829 97.915,16.829 v1(98.089,16.655) ; v1(98.358,38.13) 98.434,38.206 IC36.19@98.434,39.04
  L3 w0.152: v1(98.089,16.655) 98.089,16.901 96.909,18.081 96.909,26.175 97.984,27.25 97.984,35.75 98.532,36.298 98.532,37.956 v1(98.358,38.13)
IN_7_P: C6H.1 C7H.1 IC36.20 R12H.2 | length 35.2
  Top w0.152: C6H.1@89.273,15.506 89.173,15.606 R12H.2@89.173,17.286 89.493,17.606 C7H.1@90.923,17.606 90.999,17.53 91.214,17.53 91.877,16.867 96.176,16.867 96.443,17.134 98.287,17.134 98.305,17.116 v1(98.55,17.116) ; IC36.20@98.934,39.04 98.934,38.206 v1(99.01,38.13)
  L3 w0.152: v1(98.55,17.116) 98.305,17.116 97.214,18.207 97.214,26.049 98.289,27.124 98.289,35.624 98.836,36.171 98.836,37.956 v1(99.01,38.13)
LVDS_DUAL_N0: J1.3 R138.2 | length 12.2
  Top w0.152: 188.95,60.598 188.95,59.9 189.206,59.644 190.077,59.644 190.1,59.667 190.487,59.667 ; 190.896,59.339 192.539,59.339 193.566,58.312 196.027,58.312 196.397,58.682 196.397,59.885 196.657,60.145 196.657,60.53 196.568,60.62 196.442,60.62 J1.3@195.342,59.52
LVDS_DUAL_N1: J1.6 R139.2 | length 17.4
  Top w0.152: 185.75,49.543 185.75,51.749 189.648,55.647 195.895,55.647 196.765,56.517 196.765,56.891 196.854,56.98 J1.6@197.882,56.98 J1.6@197.436,56.534
LVDS_DUAL_N2: J1.9 R140.2 | length 16.7
  Top w0.152: 189.643,44.432 190.054,44.021 191.014,44.021 191.043,43.993 191.063,43.993 191.277,43.779 191.277,43.764 191.366,43.675 192.196,43.675 192.684,44.164 192.684,49.145 194.415,50.877 196.249,50.877 196.478,51.106 196.478,53.037 J1.9@195.342,51.9
LVDS_DUAL_N3: J1.12 R141.2 | length 18
  Top w0.152: 189.557,40.298 189.557,40.047 190.208,39.395 191.13,39.395 191.206,39.319 191.226,39.319 191.44,39.105 191.44,39.043 191.482,39.001 191.745,39.001
  Bot w0.152: v1(191.961,39.162) 191.867,39.162 191.705,39.001 191.482,39.001 191.236,39.247 191.236,44.559 194.704,48.027 195.895,48.027 196.765,48.897 196.765,49.271 196.854,49.36 J1.12@197.882,49.36
LVDS_DUAL_N4: J1.15 R142.2 | length 18.2
  Top w0.152: 189.625,36.058 189.625,35.225 189.804,35.046 190.993,35.046 191.275,35.328 191.295,35.328 191.508,35.114 191.508,35.1 191.598,35.011 191.813,35.011 192.06,35.257 192.06,35.282 192.9,36.123 192.9,40.752 193.737,41.589 193.737,42.349 193.692,42.394 194.55,43.252 195.768,43.252 196.371,43.854 196.371,44.878 196.657,45.164 196.657,45.29 196.568,45.38 196.442,45.38 J1.15@195.342,44.28
LVDS_DUAL_P0: J1.2 R122.2 | length 13.2
  Top w0.152: 188.95,57.498 188.95,58.413 189.265,58.727 190.487,58.727 ; 190.896,59.034 192.413,59.034 193.44,58.007 196.153,58.007 196.702,58.556 196.702,59.759 196.962,60.019 196.962,60.657 196.783,60.835 196.783,60.961 J1.2@197.882,62.06
LVDS_DUAL_P1: J1.5 R123.2 | length 16.8
  Top w0.152: 185.25,49.543 185.263,49.556 185.263,50.196 185.445,50.378 185.445,51.875 189.522,55.952 195.768,55.952 196.46,56.643 196.46,56.891 196.371,56.98 J1.5@195.342,56.98
LVDS_DUAL_P2: J1.8 R124.2 | length 18.2
  Top w0.152: 189.643,42.346 190.35,43.053 191.043,43.053 191.063,43.053 191.277,43.267 191.277,43.281 191.366,43.37 192.322,43.37 192.989,44.038 192.989,49.019 194.542,50.572 196.372,50.572 196.375,50.572 196.783,50.98 196.783,50.983 196.783,53.215 196.783,53.341 J1.8@197.882,54.44
  Bot w0.152: J1.8@197.436,53.994 J1.8@197.882,54.44
LVDS_DUAL_P3: J1.11 R125.2 | length 18.2
  Top w0.152: 189.557,37.698 189.933,37.698 190.614,38.379 191.206,38.379 191.226,38.379 191.44,38.593 191.44,38.654 191.482,38.696 191.745,38.696
  Bot w0.152: v1(191.961,38.535) 191.867,38.535 191.705,38.696 191.356,38.696 190.931,39.121 190.931,44.685 194.578,48.332 195.768,48.332 196.46,49.023 196.46,49.271 196.371,49.36 J1.11@195.342,49.36
LVDS_DUAL_P4: J1.14 R126.2 | length 19.1
  Top w0.152: 189.625,33.458 189.625,34.517 189.779,34.671 190.992,34.671 191.275,34.388 191.295,34.388 191.508,34.602 191.508,34.616 191.598,34.706 191.939,34.706 192.365,35.131 192.365,35.156 193.205,35.996 193.205,40.626 194.042,41.462 194.042,42.312 194.677,42.947 195.895,42.947 196.676,43.728 196.676,44.752 196.962,45.038 196.962,45.417 196.783,45.595 196.783,45.721 J1.14@197.436,46.374
  Bot w0.152: J1.14@197.436,46.374 J1.14@197.882,46.82
N12V0A: C10A.2 C10B.2 C10C.2 C10D.2 C10E.2 C10F.2 C10G.2 C10H.2 C11A.2 C11B.2 C11C.2 C11D.2 C11E.2 C11F.2 C11G.2 C11H.2 C14A.2 C14B.2 C14C.2 C14D.2 C14E.2 C14F.2 C14G.2 C14H.2 C46.2 C63.2 C64.2 C105.2 D1A.1 D1B.1 D1C.1 D1D.1 D1E.1 D1F.1 D1G.1 D1H.1 D2A.1 D2B.1 D2C.1 D2D.1 D2E.1 D2F.1 D2G.1 D2H.1 D6.2 IC1A.4 IC1B.4 IC1C.4 IC1D.4 IC1E.4 IC1F.4 IC1G.4 IC1H.4 IC2A.3 IC2A.6 IC2B.3 IC2B.6 IC2C.3 IC2C.6 IC2D.3 IC2D.6 IC2E.3 IC2E.6 IC2F.3 IC2F.6 IC2G.3 IC2G.6 IC2H.3 IC2H.6 IC24.1 IC24.2 IC26.5 IC35.4 R61.2 TP9.1 | length 231
  Top w0.203: C11H.2@63.064,12.18 64.779,12.18 D2H.1@65.053,11.906 65.053,12.906 v1(65.014,12.945) ; C11G.2@63.064,22.18 64.779,22.18 D2G.1@65.053,21.906 65.053,22.906 v1(65.014,22.945) ; C11F.2@63.064,32.18 64.779,32.18 D2F.1@65.053,31.906 65.053,32.906 v1(65.014,32.945) ; C11E.2@63.064,42.18 64.779,42.18 D2E.1@65.053,41.906 65.053,42.906 v1(65.014,42.945) ; C11D.2@63.064,52.18 64.779,52.18 D2D.1@65.053,51.906 65.053,52.906 v1(65.014,52.945) ; C11B.2@63.064,72.18 64.779,72.18 D2B.1@65.053,71.906 65.053,72.906 v1(65.014,72.945) ; C11A.2@63.064,82.18 64.779,82.18 D2A.1@65.053,81.906 65.053,82.906 v1(65.014,82.945) ; C11C.2@63.077,62.136 64.792,62.136 D2C.1@65.066,61.862 65.066,62.862 v1(65.027,62.902) ; v1(65.038,19.203) 65.165,19.076 66.181,19.076 66.953,18.304 D1H.1@66.953,18.191 ; v1(65.038,29.203) 65.165,29.076 66.181,29.076 66.953,28.304 D1G.1@66.953,28.191 ; v1(65.038,39.203) 65.165,39.076 66.181,39.076 66.953,38.304 D1F.1@66.953,38.191 ; v1(65.038,49.203) 65.165,49.076 66.181,49.076 66.953,48.304 D1E.1@66.953,48.191 ; v1(65.038,59.203) 65.165,59.076 66.181,59.076 66.953,58.304 D1D.1@66.953,58.191 ; v1(65.038,79.203) 65.165,79.076 66.181,79.076 66.953,78.304 D1B.1@66.953,78.191 ; v1(65.038,89.203) 65.165,89.076 66.181,89.076 66.953,88.304 D1A.1@66.953,88.191 ; v1(65.051,69.159) 65.178,69.032 66.194,69.032 66.966,68.26 D1C.1@66.966,68.147 ; D1H.1@66.953,18.118 D1H.1@66.953,18.191 ; D1G.1@66.953,28.118 D1G.1@66.953,28.191 ; D1F.1@66.953,38.118 D1F.1@66.953,38.191 ; D1E.1@66.953,48.118 D1E.1@66.953,48.191 ; D1D.1@66.953,58.118 D1D.1@66.953,58.191 ; D1B.1@66.953,78.118 D1B.1@66.953,78.191 ; D1A.1@66.953,88.118 D1A.1@66.953,88.191 ; D1C.1@66.966,68.074 D1C.1@66.966,68.147 ; D1H.1@67.025,18.238 66.966,18.178 D1H.1@66.953,18.191 ; D1G.1@67.025,28.238 66.966,28.178 D1G.1@66.953,28.191 ; D1F.1@67.025,38.238 66.966,38.178 D1F.1@66.953,38.191 ; D1E.1@67.025,48.238 66.966,48.178 D1E.1@66.953,48.191 ; D1D.1@67.025,58.238 66.966,58.178 D1D.1@66.953,58.191 ; D1B.1@67.025,78.238 66.966,78.178 D1B.1@66.953,78.191 ; D1A.1@67.025,88.238 66.966,88.178 D1A.1@66.953,88.191 ; D1C.1@67.038,68.194 66.978,68.135 D1C.1@66.966,68.147 ; v1(69.277,8.386) 69.32,8.43 D6.2@70.864,8.43 ; v1(70.839,9.93) 70.839,9.955 70.864,9.93 D6.2@70.864,8.43 ; C10H.2@71.785,11.648 C10H.2@71.845,11.588 ; C10G.2@71.785,21.648 C10G.2@71.845,21.588 ; C10F.2@71.785,31.648 C10F.2@71.845,31.588 ; C10E.2@71.785,41.648 C10E.2@71.845,41.588 ; C10D.2@71.785,51.648 C10D.2@71.845,51.588 ; C10B.2@71.785,71.648 C10B.2@71.845,71.588 ; C10A.2@71.785,81.648 C10A.2@71.845,81.588 ; C10C.2@71.798,61.604 C10C.2@71.858,61.544 ; C10H.2@71.935,11.498 C10H.2@71.845,11.588 ; C10G.2@71.935,21.498 C10G.2@71.845,21.588 ; C10F.2@71.935,31.498 C10F.2@71.845,31.588 ; C10E.2@71.935,41.498 C10E.2@71.845,41.588 ; C10D.2@71.935,51.498 C10D.2@71.845,51.588 ; C10B.2@71.935,71.498 C10B.2@71.845,71.588 ; C10A.2@71.935,81.498 C10A.2@71.845,81.588 ; C10C.2@71.948,61.454 C10C.2@71.858,61.544 ; v1(72.514,8.43) D6.2@70.864,8.43 ; IC2H.6@72.845,17.517 72.845,16.146 v1(71.785,15.086) 71.785,14.25 71.797,14.238 71.797,13.165 IC2H.3@71.845,13.117 C10H.2@71.845,11.588 ; IC2G.6@72.845,27.517 72.845,26.146 v1(71.785,25.086) 71.785,24.25 71.797,24.238 71.797,23.165 IC2G.3@71.845,23.117 C10G.2@71.845,21.588 ; IC2F.6@72.845,37.517 72.845,36.146 v1(71.785,35.086) 71.785,34.25 71.797,34.238 71.797,33.165 IC2F.3@71.845,33.117 C10F.2@71.845,31.588 ; IC2E.6@72.845,47.517 72.845,46.146 v1(71.785,45.086) 71.785,44.25 71.797,44.238 71.797,43.165 IC2E.3@71.845,43.117 C10E.2@71.845,41.588 ; IC2D.6@72.845,57.517 72.845,56.146 v1(71.785,55.086) 71.785,54.25 71.797,54.238 71.797,53.165 IC2D.3@71.845,53.117 C10D.2@71.845,51.588 ; IC2B.6@72.845,77.517 72.845,76.146 v1(71.785,75.086) 71.785,74.25 71.797,74.238 71.797,73.165 IC2B.3@71.845,73.117 C10B.2@71.845,71.588 ; IC2A.6@72.845,87.517 72.845,86.146 v1(71.785,85.086) 71.785,84.25 71.797,84.238 71.797,83.165 IC2A.3@71.845,83.117 C10A.2@71.845,81.588 ; IC2C.6@72.858,67.473 72.858,66.103 v1(71.798,65.043) 71.798,64.206 71.809,64.194 71.809,63.121 IC2C.3@71.858,63.073 C10C.2@71.858,61.544 ; IC1H.4@87.489,12.459 87.985,12.459 v1(88.064,12.38) 88.064,12.18 C14H.2@88.564,11.68 ; IC1G.4@87.489,22.459 87.985,22.459 v1(88.064,22.38) 88.064,22.18 C14G.2@88.564,21.68 ; IC1F.4@87.489,32.459 87.985,32.459 v1(88.064,32.38) 88.064,32.18 C14F.2@88.564,31.68 ; IC1E.4@87.489,42.459 87.985,42.459 v1(88.064,42.38) 88.064,42.18 C14E.2@88.564,41.68 ; IC1D.4@87.489,52.459 87.985,52.459 v1(88.064,52.38) 88.064,52.18 C14D.2@88.564,51.68 ; IC1B.4@87.489,72.459 87.985,72.459 v1(88.064,72.38) 88.064,72.18 C14B.2@88.564,71.68 ; IC1A.4@87.489,82.459 87.985,82.459 v1(88.064,82.38) 88.064,82.18 C14A.2@88.564,81.68 ; IC1C.4@87.502,62.415 87.998,62.415 v1(88.077,62.336) 88.077,62.136 C14C.2@88.577,61.636 ; v1(92.039,62.73) 96.014,62.73 96.814,61.93 96.789,61.905 C105.2@96.789,61.455 98.164,61.455 IC35.4@98.264,61.555 ; TP9.1@109.514,29.68 109.514,28.93 110.364,28.08 111.164,28.08 111.314,27.93 C63.2@111.314,27.18 111.514,26.98 C64.2@113.014,26.98 113.375,27.341 115.648,27.341 IC26.5@115.787,27.48
  Top w0.254: 110.464,24.705 110.464,24.684 110.714,24.434 IC24.2@111.739,24.434
  L3 w0.203: v1(64.911,15.139) 64.964,15.086 v1(71.785,15.086) ; v1(64.911,25.139) 64.964,25.086 v1(71.785,25.086) ; v1(64.911,35.139) 64.964,35.086 v1(71.785,35.086) ; v1(64.911,45.139) 64.964,45.086 v1(71.785,45.086) ; v1(64.911,55.139) 64.964,55.086 v1(71.785,55.086) ; v1(64.911,75.139) 64.964,75.086 v1(71.785,75.086) ; v1(64.911,85.139) 64.964,85.086 v1(71.785,85.086) ; v1(64.924,65.095) 64.976,65.043 v1(71.798,65.043) ; v1(88.077,62.336) 88.605,62.865 91.904,62.865 v1(92.039,62.73)
  Bot w1.27: v1(88.064,12.38) 88.064,8.88 91.026,5.918 103.22,5.918 105.514,8.212 105.514,12.943 110.658,18.086 110.658,21.724 110.789,21.855
  other v2: 111.04,21.639 110.564,22.257
N13V0: C61.2 C62.2 IC24.7 IC24.8 IC24.9 IC26.2 L6.2 R42.2 | length 101.2
  Top w0.254: v3(113.639,24.684) 113.639,24.632 113.837,24.434 IC24.7@114.539,24.434 ; IC24.8@114.539,24.934 v1(115.294,24.934)
  Top w0.508: 112.014,78.68 112.014,79.352 112.626,79.964 112.626,82.746 112.014,83.358 R42.2@112.014,85.63 ; 117.514,74.93 122.514,74.93 123.264,74.18 123.264,72.28 121.264,70.28 L6.2@120.514,70.28 ; IC26.2@118.614,28.43 v2@119.489,28.43 ; C61.2@120.289,28.98 120.456,28.98 120.956,29.48 C62.2@122.264,29.48
  Top w0.762: 117.514,74.93 113.764,78.68 112.014,78.68 110.364,78.68 109.764,78.08 109.764,73.255 112.681,70.338 112.681,61.863 117.614,56.93 117.614,51.298 118.87,50.042 118.87,42.265 119.85,41.285 119.85,41.274 120.214,40.91 120.214,37.672 119.277,36.735 119.277,30.26 119.672,29.865 119.672,29.506 120.198,28.98 120.239,28.98 119.639,28.38 119.489,28.38 119.506,28.363 121.162,28.363 v2(121.211,28.314)
  Bot w0.762: v3(112.639,24.684) v3(113.639,24.684) v3@113.639,24.884 ; 113.988,24.777 115.138,24.777 v1(115.294,24.934) 116.068,24.934 116.514,25.38 116.514,27.034 117.794,28.314 v2(121.211,28.314)
  other v2: 119.436,28.335
  other v3: 112.639,23.684 113.639,23.684
N13V0S: C58.2 IC25.4 L5.1 R58.1 | length 42.8
  Top w0.203: L5.1@124.514,65.78 127.114,65.78 127.314,65.98 127.514,66.18 127.514,68.03 C58.2@127.664,68.18
  Top w0.762: L5.1@124.514,65.78 124.714,65.98 127.314,65.98 ; R58.1@125.264,81.23 125.333,81.299 R58.1@125.383,81.299 ; R58.1@125.383,81.249 125.333,81.249 125.308,81.274 125.264,81.318 125.264,83.88 ; 127.514,66.18 127.664,66.33 C58.2@127.664,68.18 129.764,70.28 129.764,71.68 130.514,72.43 130.514,82.785 129.719,83.58 125.564,83.58 125.264,83.88 ; IC25.4@127.864,91.035 125.264,88.435 125.264,83.88
NetC1A_2: C1A.2 C2A.2 D1A.3 IC2A.10 R3A.2 | length 13.5
  Top w0.203: R3A.2@63.532,88.872 C1A.2@63.532,87.348 64.473,87.348 64.553,87.268 64.553,86.318 65.053,85.818 D1A.3@66.003,85.818 66.772,85.818 66.816,85.774 66.816,85.139 67.415,84.54 C2A.2@68.899,84.54 68.935,84.504 70.118,84.504 70.845,85.231 IC2A.10@70.845,87.517
NetC1B_2: C1B.2 C2B.2 D1B.3 IC2B.10 R3B.2 | length 13.5
  Top w0.203: R3B.2@63.532,78.872 C1B.2@63.532,77.348 64.473,77.348 64.553,77.268 64.553,76.318 65.053,75.818 D1B.3@66.003,75.818 66.772,75.818 66.816,75.774 66.816,75.139 67.415,74.54 C2B.2@68.899,74.54 68.935,74.504 70.118,74.504 70.845,75.231 IC2B.10@70.845,77.517
NetC1C_2: C1C.2 C2C.2 D1C.3 IC2C.10 R3C.2 | length 13.5
  Top w0.203: R3C.2@63.545,68.828 C1C.2@63.545,67.304 64.486,67.304 64.566,67.224 64.566,66.274 65.066,65.774 D1C.3@66.016,65.774 66.785,65.774 66.829,65.73 66.829,65.095 67.427,64.497 C2C.2@68.911,64.497 68.948,64.46 70.131,64.46 70.858,65.187 IC2C.10@70.858,67.473
NetC1D_2: C1D.2 C2D.2 D1D.3 IC2D.10 R3D.2 | length 13.5
  Top w0.203: R3D.2@63.532,58.872 C1D.2@63.532,57.348 64.473,57.348 64.553,57.268 64.553,56.318 65.053,55.818 D1D.3@66.003,55.818 66.772,55.818 66.816,55.774 66.816,55.139 67.415,54.54 C2D.2@68.899,54.54 68.935,54.504 70.118,54.504 70.845,55.231 IC2D.10@70.845,57.517
NetC1E_2: C1E.2 C2E.2 D1E.3 IC2E.10 R3E.2 | length 13.5
  Top w0.203: R3E.2@63.532,48.872 C1E.2@63.532,47.348 64.473,47.348 64.553,47.268 64.553,46.318 65.053,45.818 D1E.3@66.003,45.818 66.772,45.818 66.816,45.774 66.816,45.139 67.415,44.54 C2E.2@68.899,44.54 68.935,44.504 70.118,44.504 70.845,45.231 IC2E.10@70.845,47.517
NetC1F_2: C1F.2 C2F.2 D1F.3 IC2F.10 R3F.2 | length 13.5
  Top w0.203: R3F.2@63.532,38.872 C1F.2@63.532,37.348 64.473,37.348 64.553,37.268 64.553,36.318 65.053,35.818 D1F.3@66.003,35.818 66.772,35.818 66.816,35.774 66.816,35.139 67.415,34.54 C2F.2@68.899,34.54 68.935,34.504 70.118,34.504 70.845,35.231 IC2F.10@70.845,37.517
NetC1G_2: C1G.2 C2G.2 D1G.3 IC2G.10 R3G.2 | length 13.5
  Top w0.203: R3G.2@63.532,28.872 C1G.2@63.532,27.348 64.473,27.348 64.553,27.268 64.553,26.318 65.053,25.818 D1G.3@66.003,25.818 66.772,25.818 66.816,25.774 66.816,25.139 67.415,24.54 C2G.2@68.899,24.54 68.935,24.504 70.118,24.504 70.845,25.231 IC2G.10@70.845,27.517